# Altium PCB alarm_clock_devkit.PcbDoc
Units mil, origin at the board's own origin, x right, y up, seen from the top; angles counter-clockwise.
Board outline 2165.35 x 2559.06 mil, 4 copper layers (Top Layer, Layer 1, Layer 2, Bottom Layer), stack 62.449 mil thick; 85 components, 79 nets, 322 pads, 233 vias.
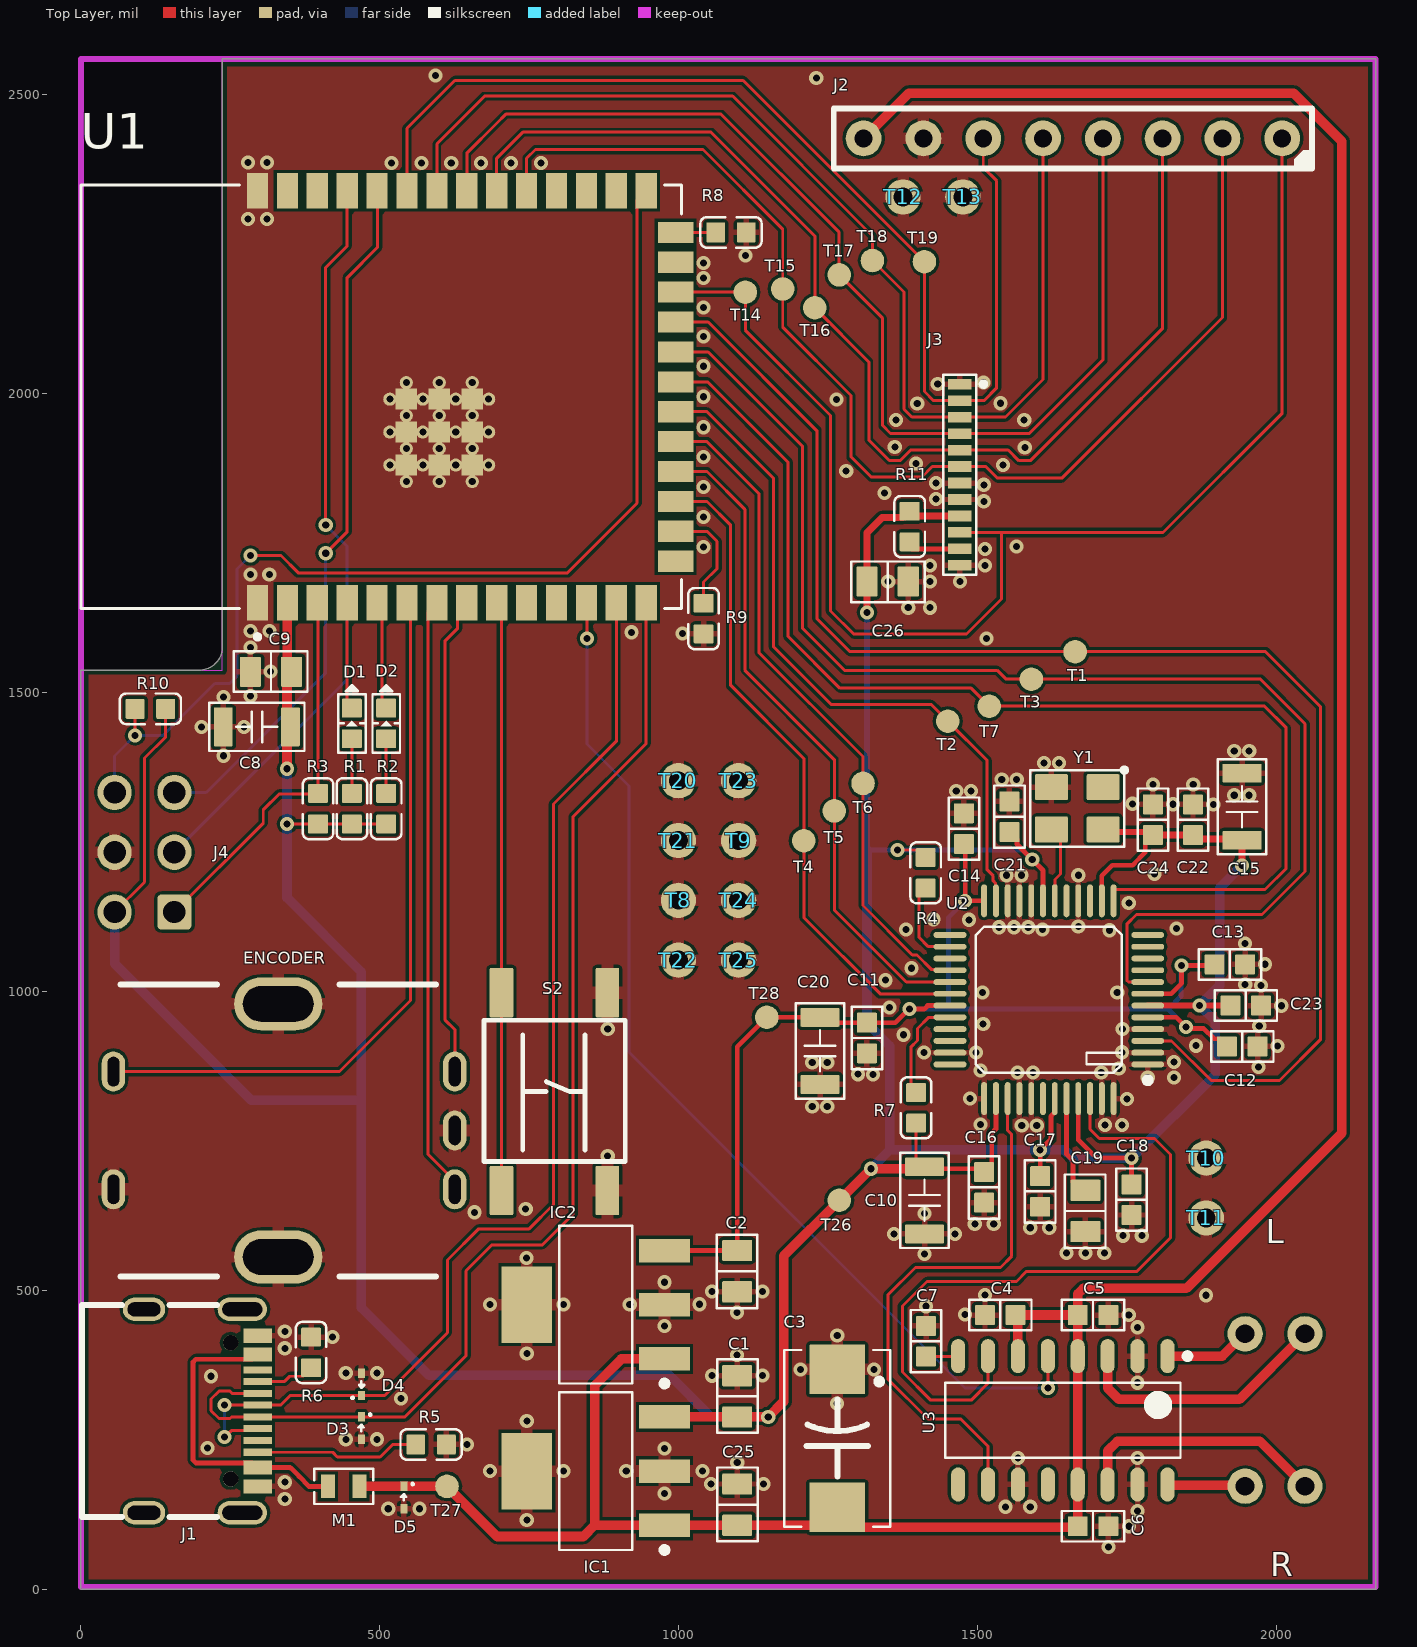
[diagram p0: Top Layer view]
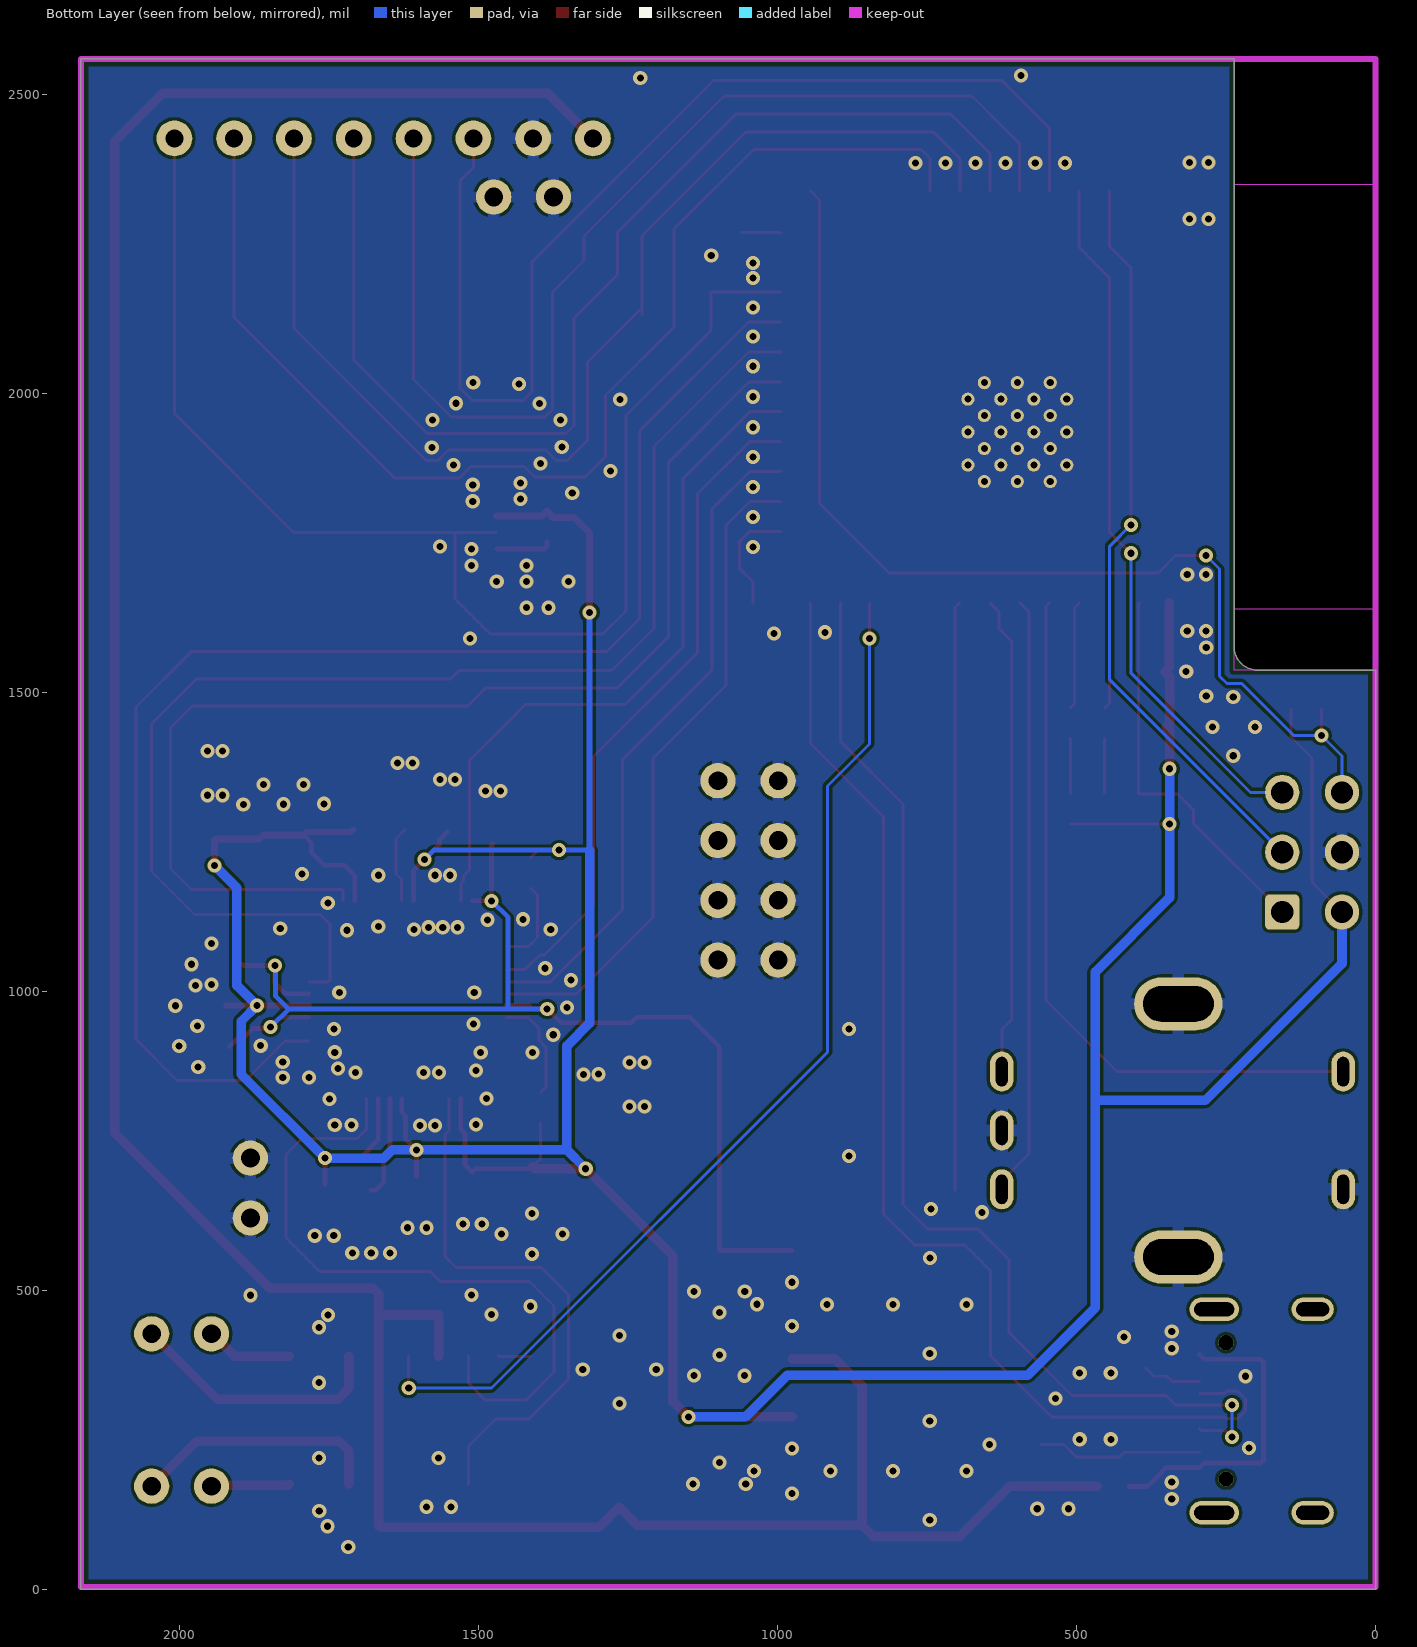
[diagram p1: Bottom Layer view, seen from below]
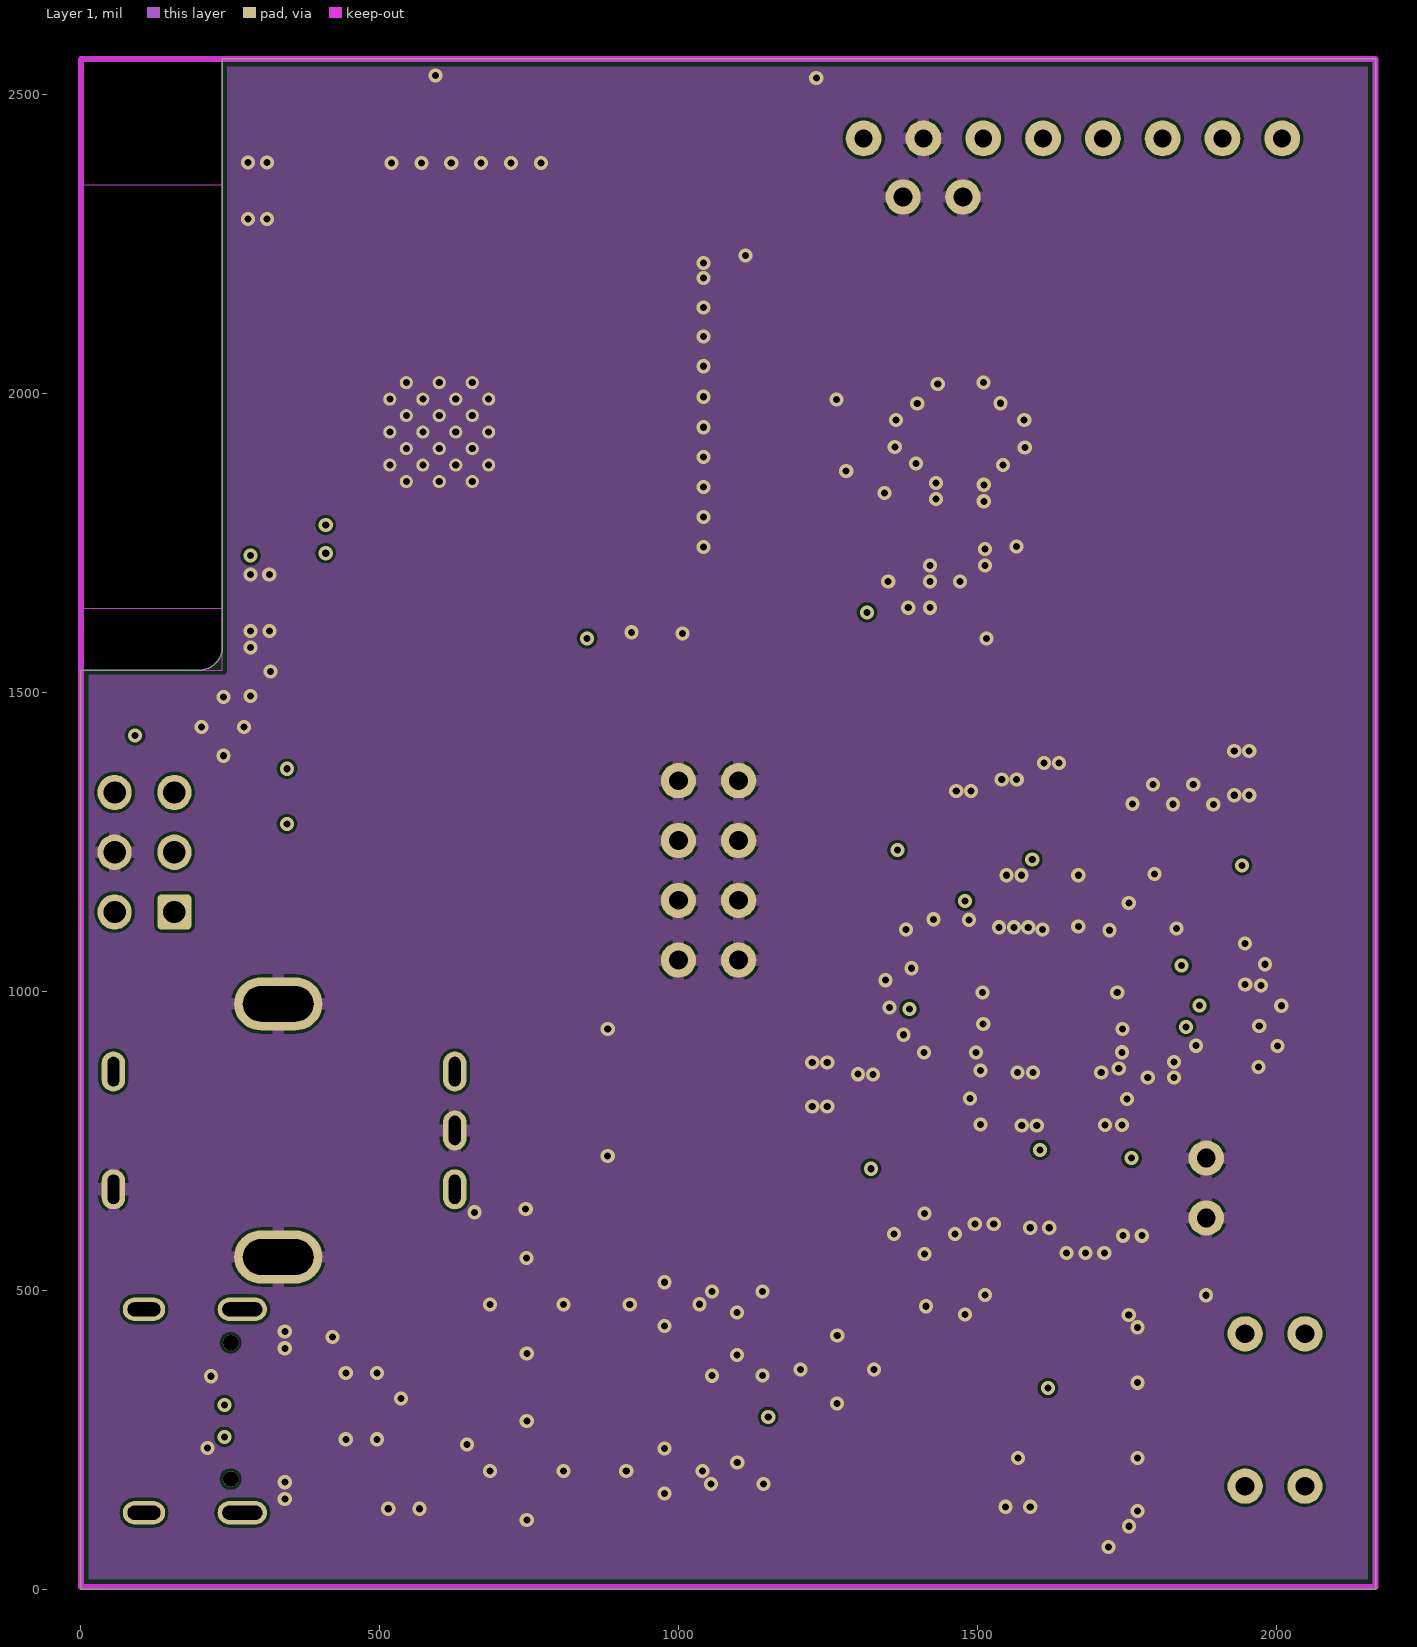
[diagram p2: Layer 1]
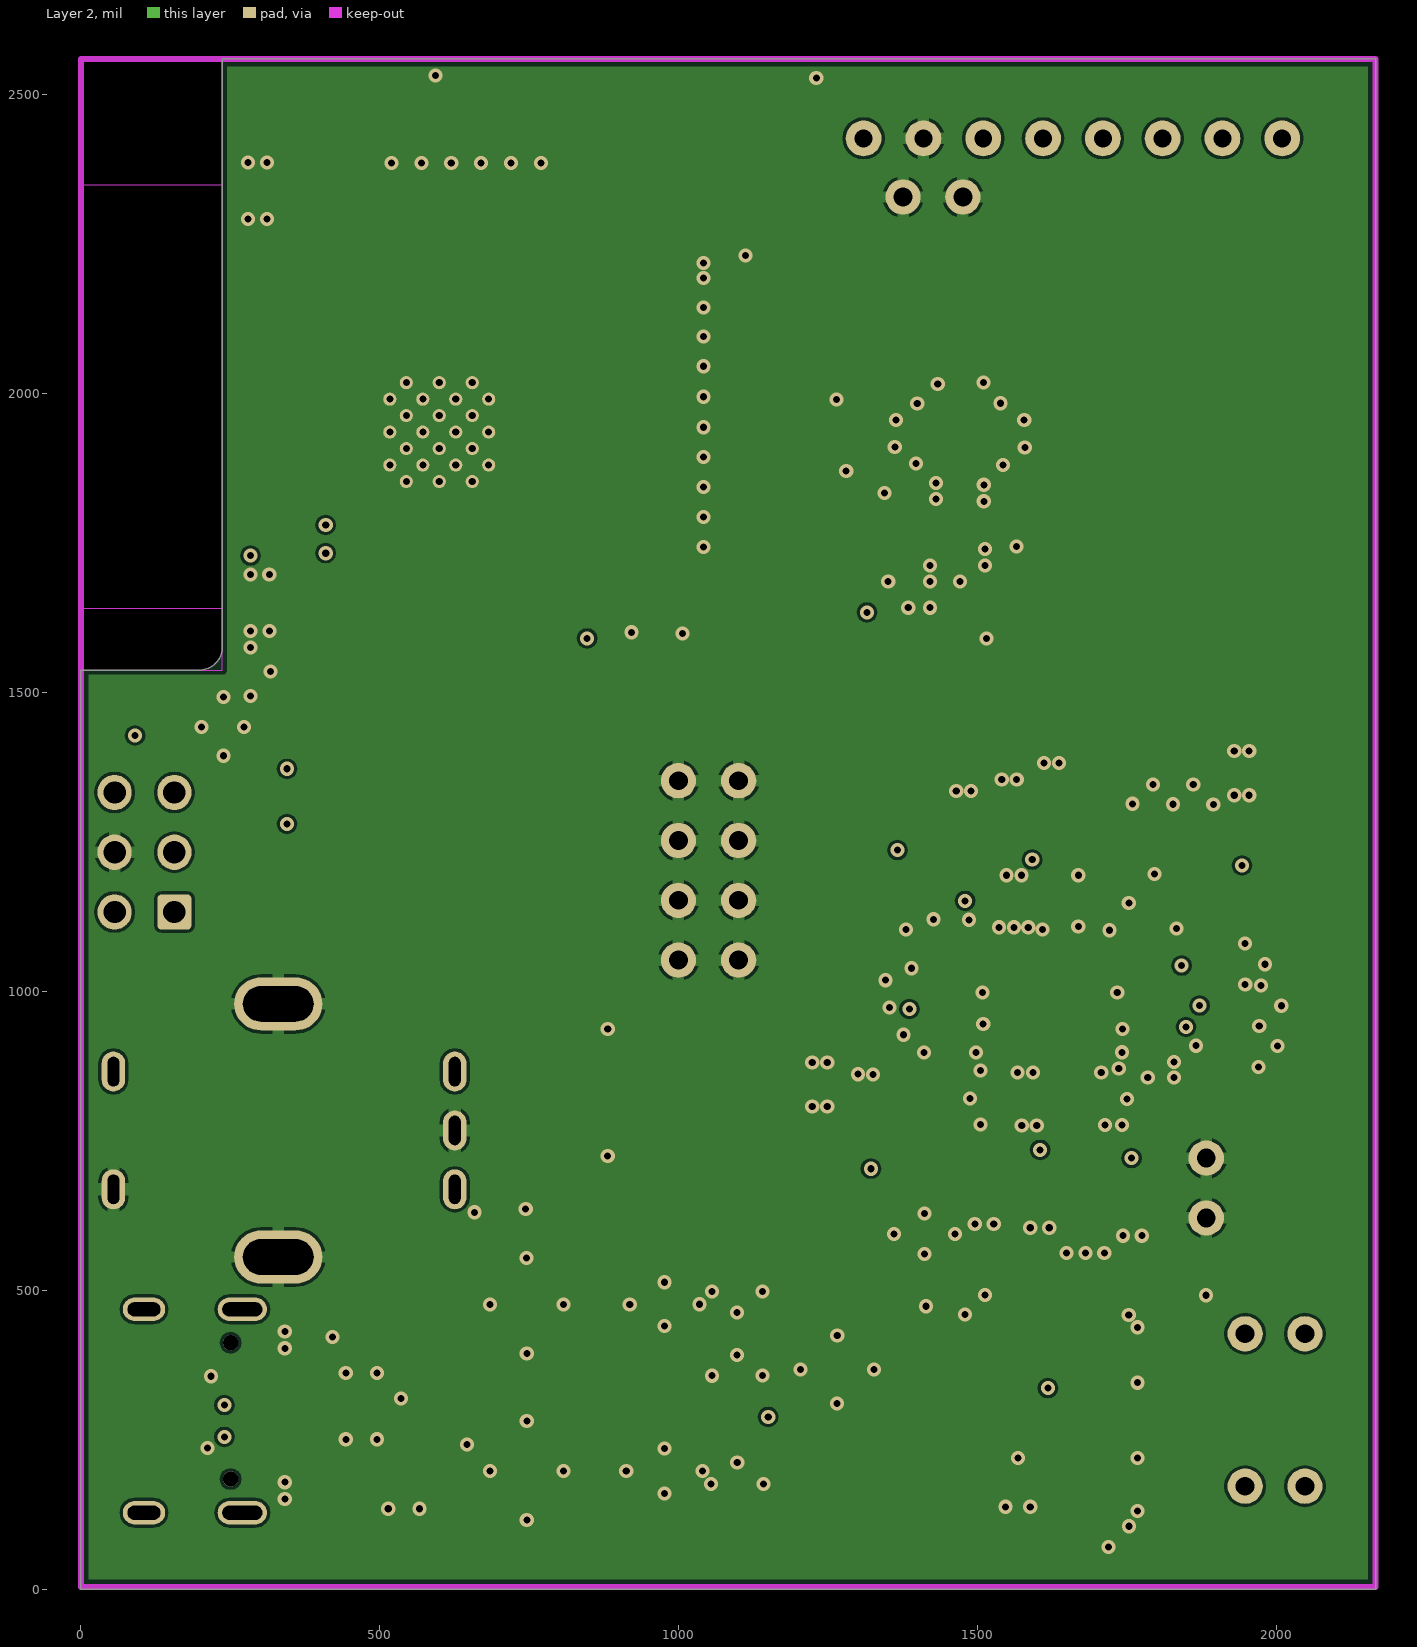
[diagram p3: Layer 2]

## Layer stack, top to bottom
Top Solder: solder mask 1, SM-001, Dk 4
Top Layer: signal copper 1.378
Dielectric 2: prepreg 8.2835, PP-006, Dk 4.1
Layer 1: signal copper 0.5984
Dielectric 1: core 41.9291, Core-043, Dk 4.3
Layer 2: signal copper 0.5984
Dielectric 3: prepreg 8.2835, PP-006, Dk 4.1
Bottom Layer: signal copper 1.378
Bottom Solder: solder mask 1, SM-001, Dk 4

## Board outline
0,0 0,1536.8 197.74,1536.8 197.83,1536.89 ccw(c197.83,1575.79) 236.73,1575.79 236.72,1575.78 236.72,2559.06 2165.35,2559.06 2165.35,0

## Design rules (kind name [scope] priority, off if disabled: settings)
AcuteAngle [All] p1: minimum=4.50000000000000E+0001 checktracksonly=TRUE
BoardOutlineClearance [InLayerClass('Electrical Layers')] p1: gap=7.87 ignorepadtopadclearanceinfootprint=FALSE except(15.75: Arc-SplitBarrior Arc-SplitContinuation Track-SplitBarrior Track-SplitContinuation SMDPad-SplitBarrior SMDPad-SplitContinuation THPad-SplitBarrior THPad-SplitContinuation Via-SplitBarrior Via-SplitContinuation Fill-SplitBarrior Fill-SplitContinuation Poly-SplitBarrior Poly-SplitContinuation Region-SplitBarrior Region-SplitContinuation Text-SplitBarrior Text-SplitContinuation)
Clearance Clearance_AGND [InPadClass('AGND_TIE') vs InNet('GND') And OnBottomLayer] p1: gap=-3.94 ignorepadtopadclearanceinfootprint=FALSE except(0: Arc-Hole Track-Hole SMDPad-Hole THPad-Hole Via-Hole Fill-Hole Poly-Hole Region-Hole Text-Hole)
Clearance Clearance_VCC [InNetClass('POWER24') And ((IsPad And (InNet('GND') Or InNet('VCC_LED'))) Or InPolygon) vs InNetClass('POWER24') And ((IsPad And (InNet('GND') Or InNet('VCC_LED'))) Or InPolygon)] p2: gap=20 ignorepadtopadclearanceinfootprint=FALSE except(0: Arc-Hole Track-Hole SMDPad-Hole THPad-Hole Via-Hole Fill-Hole Poly-Hole Region-Hole Text-Hole)
Clearance Clearance_Keepout [All vs IsKeepOut] p3: gap=7.87 ignorepadtopadclearanceinfootprint=FALSE except(0: Arc-Hole Track-Hole SMDPad-Hole THPad-Hole Via-Hole Fill-Hole Poly-Hole Region-Hole Text-Hole)
Clearance [All] p4: gap=5 ignorepadtopadclearanceinfootprint=FALSE except(0: Arc-Hole Track-Hole SMDPad-Hole THPad-Hole Via-Hole Fill-Hole Poly-Hole Region-Hole Text-Hole; 5.98: SMDPad-SMDPad; 7.87: Via-Via Poly-Region; 8: Track-THPad Track-Via)
ComponentClearance ComponentClearance_TestPoints [All vs InComponentClass('TestPoint')] p1: gap=0 collisioncheckmode=3 verticalgap=0 showdistances=FALSE
ComponentClearance [All] p2: gap=3.94 collisioncheckmode=3 verticalgap=100000 showdistances=FALSE
HoleSize [All] p1: absolutevalues=TRUE maxlimit=118.11 minlimit=11.81 maxpercent=80.000 minpercent=20.000
HoleToHoleClearance [All] p1: gap=7.87 allowstackedmicrovias=TRUE
MinimumAnnularRing MinimumAnnularRing_Pad [IsPad] p1: minimumring=5.12
MinimumAnnularRing MinimumAnnularRing_Via [IsVia] p2: minimumring=5.12
MinimumSolderMaskSliver [All] p1: minsoldermaskwidth=3.94
PlaneClearance [All] p1: clearance=5
PlaneConnect [All] p1: planeconnectstyle=Relief reliefexpansion=20 reliefentries=4 reliefconductorwidth=5 reliefairgap=5
PolygonConnect PolygonConnect_1 [InComponentClass('ESP') And IsPad vs InNet('GND')] p1: connectstyle=Direct reliefconductorwidth=10 reliefentries=4 polygonreliefangle="90 Angle" airgapwidth=10
PolygonConnect PolygonConnect_FET_HEATSINK [InNet('VCC_LED') OR InNet('VCC24') OR InNet('PSU_SW') OR InNet('VCC3V3') OR InComponent('U4') OR InNet('NetC34_2') OR InNet('AGND') OR InPadClass('AGND_TIE') OR IsTestpoint] p2: connectstyle=Direct reliefconductorwidth=10 reliefentries=4 polygonreliefangle="90 Angle" airgapwidth=5
PolygonConnect PolygonConnect_HOLES [InNet('GND') vs (PadViaLibraryTemplate='mounting_hole') OR (PadViaLibraryTemplate='strain_hole') OR (PadViaLibraryTemplate='gnd_stitch')] p3: connectstyle=Direct reliefconductorwidth=10 reliefentries=4 polygonreliefangle="90 Angle" airgapwidth=5
PolygonConnect PolygonConnect_BIGPADS [(AsMils(PadXSize_TopLayer) >= 50) AND (AsMils(PadYSize_TopLayer) >= 50)] p4: connectstyle=Relief reliefconductorwidth=20 reliefentries=4 polygonreliefangle="90 Angle" airgapwidth=5
PolygonConnect PolygonConnect_MEDIUMPADS [(AsMils(PadXSize_TopLayer) + AsMils(PadYSize_TopLayer)) >= 100] p5: connectstyle=Relief reliefconductorwidth=21.26 reliefentries=4 polygonreliefangle="90 Angle" airgapwidth=5
PolygonConnect [All] p6: connectstyle=Relief reliefconductorwidth=10 reliefentries=4 polygonreliefangle="90 Angle" airgapwidth=5
RoutingVias [All] p1: holewidth=28 width=50 viastyle="Through Hole" minholewidth=28 minwidth=50 maxholewidth=28 maxwidth=50 useviatemplates=TRUE viatemplateguid#1={55BDA720-6EEC-452C-9E69-FEF155F6DC43} viatemplateguid#2={73302ACE-9E23-44E9-BB12-906B9518E2AD} viatemplatename#1=GND_VIA viatemplatename#2=POWER_VIA
ShortCircuit ShortCircuit_AGND [InPadClass('AGND_TIE') vs InNet('GND')] p1: allowed=TRUE
ShortCircuit [All] p2: allowed=FALSE
SilkToSilkClearance [All] p1: silktosilkclearance=0
SilkToSolderMaskClearance [All] p1: minsilkscreentomaskgap=0 clearancetoexposedcopper=TRUE
SolderMaskExpansion SolderMaskExpansion_VIA [PadViaLinkedToTemplate] p1: expansion=1.97 istentingtop=TRUE
SolderMaskExpansion [All] p2: expansion=1.97 istentingtop=FALSE
Width [All] p1: maxlimit=50 minlimit=5 preferedwidth=5
21 further rules are at their usual default settings.

## Classes and differential pairs
component class ESP: U1
component class USB_POWER: C1 C2 C25 D3 D4 D5 IC1 IC2 J1 M1 R5 R6 T26 T27 T28
component class ESP32_ETC: C3 C4 C5 C6 C7 C8 C9 C10 C11 C12 C13 C14 C15 C16 C17 C18 C19 C20 C21 C22 C23 C24 C26 J2 J3 J4 L R R3 R4 R7 R8 R9 R10 R11 T1 T2 T3 T4 T5 T6 T7 T14 T15 T16 T17 T18 T19 U1 U2 U3 Y1
component class BUTTONS_LEDS: D1 D2 ENCODER R1 R2 S2 T8 T9 T10 T11 T12 T13 T20 T21 T22 T23 T24 T25

## Components (designator, comment, footprint, x,y, rotation, side; value= is the part's Value field where it differs from the comment)
C1 "22uF" "CAP 0805_2012" 1097.64,322.37 r270 top
C2 "22uF" "CAP 0805_2012" 1097.64,531.69 r90 top
C3 "470uF" CAPMP7343X11L 1265,252.16 r270 top
C4 "100nF" "CAP 0603_1608" 1537.57,458.35 r0 top
C5 "100nF" "CAP 0603_1608" 1692.68,458.35 r180 top
C6 "100nF" "CAP 0603_1608" 1692.68,105.09 r180 top
C7 "" "CAP 0603_1608" 1413.39,414.54 r270 top
C8 "10uF" "CAP 1210_3225" 294.28,1441.94 r0 top
C9 "100nF" "CAP 0805_2012" 317.89,1534.05 r0 top
C10 "10uF" "CAP 1210_3225" 1410.83,650.17 r90 top
C11 "100nF" "CAP 0603_1608" 1314.57,921.69 r90 top
C12 "100nF" "CAP 0603_1608" 1942.38,907.56 r180 top
C13 "100nF" "CAP 0603_1608" 1921.57,1044.8 r180 top
C14 "100nF" "CAP 0603_1608" 1476.83,1271.76 r270 top
C15 "10uF" "CAP 1210_3225" 1941.83,1308.37 r270 top
C16 "100nF" "CAP 0603_1608" 1510.54,671.77 r90 top
C17 "100nF" "CAP 0603_1608" 1604.28,665.02 r90 top
C18 "100nF" "CAP 0603_1608" 1757.09,651.21 r90 top
C19 "1uF" "CAP 0805_2012" 1680.02,632.4 r90 top
C20 "10uF" "CAP 1210_3225" 1236.12,900.08 r90 top
C21 "100nF" "CAP 0603_1608" 1552.83,1291.76 r270 top
C22 "100nF" "CAP 0603_1608" 1859.83,1286.76 r270 top
C23 "100nF" "CAP 0603_1608" 1948.13,975.87 r180 top
C24 "100nF" "CAP 0603_1608" 1792.83,1286.76 r270 top
C25 "2.2uF" "CAP 0805_2012" 1097.64,141.27 r270 top
C26 "1uF" "CAP 0805_2012" 1349.13,1685.04 r180 top
D1 "" "SMT_LED 0603_RED" 453.14,1447.72 r90 top
D2 "" "SMT_LED 0603_RED" 510.6,1447.72 r90 top
D3 "TVS_DIODE" SODFL98X40-2L 469,269.21 r270 top
D4 "TVS_DIODE" SODFL98X40-2L 469,342.42 r90 top
D5 "TVS_DIODE" SODFL98X40-2L 540,153.07 r270 top
ENCODER "ROTARY_ENCODER" ENCODER 330,767 r90 top
IC1 "AZ1117CH" SOT230P700X180-4N 860.87,197.32 r180 top
IC2 "AZ1117CH" SOT230P700X180-4N 860.87,475.63 r180 top
J1 "USB_C" USB-C-SMD_G-SWITCH_GT-USB-7010ASV 200,297.75 r270 top
J2 "CON_8" CON8 2009.06,2426.18 r180 top
J3 "LCD_CON12" LCD_CON12 1470,2015.14 r270 top
J4 "ESP_PROG" ESP_PROG 106.3,1232.28 r90 top
L "JST_XH" JST_XH_x2 1997,427 r0 top
M1 "FUSE" "FUSE 0603_1608 0.5MM" 439.38,171.77 r0 top
R "JST_XH" JST_XH_x2 1997,172 r0 top
R1 "" "RES 0603_1608" 453.14,1305.13 r90 top
R2 "" "RES 0603_1608" 510.6,1305.13 r90 top
R3 "100k" "RES 0603_1608" 396.57,1305.13 r270 top
R4 "100k" "RES 0603_1608" 1412.83,1197.9 r270 top
R5 "5.1k" "RES 0603_1608" 585.59,241.85 r180 top
R6 "5.1k" "RES 0603_1608" 385,395.74 r270 top
R7 "100k" "RES 0603_1608" 1396.83,804.86 r90 top
R8 "100k" "RES 0603_1608" 1087.15,2268.98 r0 top
R9 "100k" "RES 0603_1608" 1041.4,1623.01 r90 top
R10 "" "RES 0603_1608" 116.14,1472.13 r180 top
R11 "100" "RES 0603_1608" 1386.09,1776.95 r90 top
S2 "4-1437565-1" FSM-SWITCH 792,832 r180 top
T1 "TESTPOINT" TESTPOINT_1MM 1662.66,1567.65 r0 top
T2 "TESTPOINT" TESTPOINT_1MM 1449.83,1451.44 r0 top
T3 "TESTPOINT" TESTPOINT_1MM 1589.56,1521.66 r0 top
T4 "TESTPOINT" TESTPOINT_1MM 1209,1251.68 r0 top
T5 "TESTPOINT" TESTPOINT_1MM 1260,1301.4 r0 top
T6 "TESTPOINT" TESTPOINT_1MM 1308,1347.46 r0 top
T7 "TESTPOINT" TESTPOINT_1MM 1519.11,1476.55 r0 top
T8 "TESTPOINT" TESTPOINT_TH 999.25,1151.88 r0 top
T9 "TESTPOINT" TESTPOINT_TH 1100,1251.88 r0 top
T10 "TESTPOINT" TESTPOINT_TH 1882.01,720.73 r0 top
T11 "TESTPOINT" TESTPOINT_TH 1882.01,620.73 r0 top
T12 "TESTPOINT" TESTPOINT_TH 1375,2328.15 r90 top
T13 "TESTPOINT" TESTPOINT_TH 1475,2328.15 r90 top
T14 "TESTPOINT" TESTPOINT_1MM 1111.22,2168.98 r0 top
T15 "TESTPOINT" TESTPOINT_1MM 1173.74,2174.3 r0 top
T16 "TESTPOINT" TESTPOINT_1MM 1227.31,2142.76 r0 top
T17 "TESTPOINT" TESTPOINT_1MM 1268.09,2197.88 r0 top
T18 "TESTPOINT" TESTPOINT_1MM 1323.81,2221.81 r0 top
T19 "TESTPOINT" TESTPOINT_1MM 1410.68,2219.87 r0 top
T20 "TESTPOINT" TESTPOINT_TH 999.25,1351.88 r0 top
T21 "TESTPOINT" TESTPOINT_TH 999.25,1251.88 r0 top
T22 "TESTPOINT" TESTPOINT_TH 999.25,1051.88 r270 top
T23 "TESTPOINT" TESTPOINT_TH 1100,1351.88 r270 top
T24 "TESTPOINT" TESTPOINT_TH 1100,1151.88 r270 top
T25 "TESTPOINT" TESTPOINT_TH 1100,1051.88 r270 top
T26 "TESTPOINT" TESTPOINT_1MM 1268.31,650.17 r0 top
T27 "TESTPOINT" TESTPOINT_1MM 612.23,171.77 r0 top
T28 "TESTPOINT" TESTPOINT_1MM 1147.18,956.18 r0 top
U1 "ESP32-S3-WROOM-1-N16R2" XCVR_ESP32-S3-WROOM-1-N16R2 502.47,1993.98 r90 top
U2 "VS1053B" CQFP50P900X900X140-48N 1618.81,985.71 r180 top
U3 "PAM8403" SOIC127P600X175-16N 1642.09,282.32 r270 top
Y1 "12.288MHz" "NDK NX3225GA" 1666.36,1305.73 r180 top

## Footprints (in the part's own frame and the unit in brackets; to place one, negate y for a bottom-side part, rotate by r counter-clockwise, add the part's x,y. Pads: shape width x height; smd on the part's side, far side on the other; paste and mask are expansions set on the pad)
"CAP 0603_1608" [mm] "Chip Capacitor, 2-Leads, Body 1.60x0.80mm, IPC Medium Density"
  rrect10% 0.848x0.848 smd: 1(-0.65,0) 2(0.65,0)
  silkscreen extent -1.33,-0.65 1.33,0.65, body extent -0.8,-0.41 0.8,0.41, height 0.82
"CAP 0805_2012" [mm] "Chip Capacitor, 2-Leads, Body 2.00x1.20mm, IPC Medium Density"
  rrect10% 0.9x1.275 smd: 1(-0.876,0) 2(0.876,0)
  silkscreen extent -1.58,-0.85 1.55,0.87, body extent -1,-0.64 1,0.64, height 1.26
"CAP 1210_3225" [mm] "Chip Capacitor, 2-Leads, Body 3.20x1.60mm, IPC High Density"
  rrect10% 0.8x1.65 smd: 1(-1.425,0) 2(1.425,0)
  silkscreen extent -2.02,-1.02 2.02,1.02, body extent -1.6,-0.8 1.6,0.8, height 1.2
CAPMP7343X11L [mm] "Molded Capacitor, 2-Leads, Body 7.30x4.30mm, IPC High Density"
  rrect1% 2.1x2.35 smd: 1(2.925,0) 2(-2.925,0)
  silkscreen extent -3.75,-2.25 3.75,2.25, body extent -3.97,-2.25 3.97,2.25, height 1.1
CON8 [mil]
  round 60 hole 30: 1(0,0) 2(100,0) 3(200,0) 4(300,0) 5(400,0) 6(500,0) 7(600,0) 8(700,0)
  silkscreen extent -50,-50 750,50
CQFP50P900X900X140-48N [mm] "CQFP, 48-Leads, Body 9.00x9.00mm, Pitch 0.50mm, IPC Medium Density"
  oval 1.4x0.25 smd: 1(-4.2,2.75) 2(-4.2,2.25) 3(-4.2,1.75) 4(-4.2,1.25) 5(-4.2,0.75) 6(-4.2,0.25) 7(-4.2,-0.25) 8(-4.2,-0.75) 9(-4.2,-1.25) 10(-4.2,-1.75) 11(-4.2,-2.25) 12(-4.2,-2.75) 25(4.2,-2.75) 26(4.2,-2.25) 27(4.2,-1.75) 28(4.2,-1.25) 29(4.2,-0.75) 30(4.2,-0.25) 31(4.2,0.25) 32(4.2,0.75) 33(4.2,1.25) 34(4.2,1.75) 35(4.2,2.25) 36(4.2,2.75)
  oval 0.25x1.4 smd: 13(-2.75,-4.2) 14(-2.25,-4.2) 15(-1.75,-4.2) 16(-1.25,-4.2) 17(-0.75,-4.2) 18(-0.25,-4.2) 19(0.25,-4.2) 20(0.75,-4.2) 21(1.25,-4.2) 22(1.75,-4.2) 23(2.25,-4.2) 24(2.75,-4.2) 37(2.75,4.2) 38(2.25,4.2) 39(1.75,4.2) 40(1.25,4.2) 41(0.75,4.2) 42(0.25,4.2) 43(-0.25,4.2) 44(-0.75,4.2) 45(-1.25,4.2) 46(-1.75,4.2) 47(-2.25,4.2) 48(-2.75,4.2)
  silkscreen extent -4.33,-3.1 3.1,3.55, body extent -4.5,-4.5 4.5,4.5, height 1.15
ENCODER [mm] "Rotary encoder"
  oval 1.7x1 hole 0.5 slot 1.25 at 0 deg: 1(-2.5,-7.5) 2(0,-7.5) 3(2.5,-7.5) 4(-2.5,7) 5(2.5,7)
  rrect100% 2.25x3.75 hole 1.5 slot 3 at 90 deg: 2(-5.375,0)
  oval 2.25x3.75 hole 1.5 slot 3 at 90 deg: 2(5.375,0)
  silkscreen extent -6.2,-6.7 6.2,6.7, body extent -6.16,-7.75 6.14,7.25, height 21.4
ESP_PROG [mm]
  rrect25% 1.5x1.45 hole 0.95: 1(-2.54,-1.27)
  oval 1.5x1.45 hole 0.95: 2(0,-1.27) 3(2.54,-1.27) 4(2.54,1.27) 5(0,1.27) 6(-2.54,1.27)
  body extent -5.05,-2.55 5.05,2.55, height 5.4
FSM-SWITCH [mm]
  rrect10% 1x2.1 smd: 1(-2.25,4.2) 1(-2.25,-4.2) 2(2.25,4.2) 2(2.25,-4.2)
  silkscreen extent -3,-3.03 3,2.97, body extent -3,-5 3,5, height 5.07
"FUSE 0603_1608 0.5MM" [mm] "Chip Fuse 1.5A AC 5V DC, 2-Leads, Body 1.54x0.85mm"
  rect 0.6x1 smd: 1(-0.67,0) 2(0.67,0)
  silkscreen extent -1.25,-0.75 1.25,0.75, body extent -0.77,-0.42 0.77,0.43, height 0.58
JST_XH_x2 [mm]
  round 1.5 hole 0.8 mask+0: 1(-1.27,0) 2(1.27,0)
  body extent -3.61,-2.49 3.61,3.35, height 7.21
LCD_CON12 [mm]
  rect 0.45x1 smd mask+0.05: 1(0,0) 2(0.7,0) 3(1.4,0) 4(2.1,0) 5(2.8,0) 6(3.5,0) 7(4.2,0) 8(4.9,0) 9(5.6,0) 10(6.3,0) 11(7,0) 12(7.7,0)
  silkscreen extent -0.4,-0.7 8.1,1.1, body extent -13.94,-0.23 21.66,50.11, height 1.55
"NDK NX3225GA" [mm] "Crystal, 4-Leads, Body 2.50x3.20mm, Pitch 2.20mm, IPC Medium Density"
  rrect10% 1.4x1.1 smd: 1(-1.1,-0.9) 2(1.1,-0.9) 3(1.1,0.9) 4(-1.1,0.9)
  silkscreen extent -2.05,-1.67 2,1.63, body extent -1.61,-1.26 1.61,1.26, height 0.75
"RES 0603_1608" [mm] "Chip Resistor, 2-Leads, Body 1.60x0.80mm, IPC Medium Density"
  rrect12% 0.8x0.85 smd: 1(-0.65,0) 2(0.65,0)
  silkscreen extent -1.3,-0.65 1.3,0.65, body extent -0.8,-0.4 0.8,0.4, height 0.45
"SMT_LED 0603_RED" [mm] "Chip Diode, 2-Leads, Body 1.60x0.80mm, IPC Medium Density"
  rrect10% 0.8x0.85 smd: 1(-0.65,0) 2(0.65,0)
  silkscreen extent -1.24,-0.58 1.63,0.58, body extent -0.8,-0.4 0.8,0.4, height 0.53
SODFL98X40-2L [mm] "SODFL, 0.6x1.0mm"
  rrect1% 0.4x0.3 smd: 1(-0.475,0) 2(0.475,0)
  silkscreen extent -0.62,-0.13 0.13,0.42, body extent -0.49,-0.33 0.49,0.33, height 0.4
SOIC127P600X175-16N [mm] "SOIC, 16-Leads, Body 9.90x3.90mm, Pitch 1.27mm, IPC Medium Density"
  oval 1.45x0.6 smd: 1(-2.725,4.445) 2(-2.725,3.175) 3(-2.725,1.905) 4(-2.725,0.635) 5(-2.725,-0.635) 6(-2.725,-1.905) 7(-2.725,-3.175) 8(-2.725,-4.445) 9(2.725,-4.445) 10(2.725,-3.175) 11(2.725,-1.905) 12(2.725,-0.635) 13(2.725,0.635) 14(2.725,1.905) 15(2.725,3.175) 16(2.725,4.445)
  silkscreen extent -2.85,-5 1.6,5.42, body extent -3,-5 3,5, height 1.75
SOT230P700X180-4N [mm] "SOT223, 4-Leads, Body 6.50x7.00mm (avg), Pitch 2.30mm, IPC Medium Density"
  rect 2.15x1 smd: 1(-2.925,2.3) 2(-2.925,0) 3(-2.925,-2.3)
  rect 2.15x3.25 smd: 4(2.925,0)
  silkscreen extent -3.05,-3.35 1.55,3.47, body extent -3.5,-3.35 3.5,3.35, height 1.8
TESTPOINT_1MM [mm]
  round 1 smd paste-99 mask+0: 1(0,0)
TESTPOINT_TH [mm]
  round 1.5 hole 0.8 mask+0: 1(0,0)
USB-C-SMD_G-SWITCH_GT-USB-7010ASV [mm]
  oval 1x2.1 hole 0.6 slot 1.7 at 90 deg paste+0 mask+0.05: 1(-4.32,1.78) 2(4.32,1.78)
  oval 1x1.8 hole 0.6 slot 1.4 at 90 deg paste+0 mask+0.05: 3(4.32,-2.4) 4(-4.32,-2.4)
  rect 0.6x1.205 smd paste-100 mask+0.11: A1B12(-3.2,2.435) A4B9(-2.4,2.435) B1A12(3.2,2.435) B4A9(2.4,2.435)
  rect 0.3x1.205 smd paste-100 mask+0.11: A5(-1.25,2.435) A6(-0.25,2.435) A7(0.25,2.435) A8(1.25,2.435) B5(1.75,2.435) B6(0.75,2.435) B7(-0.75,2.435) B8(-1.75,2.435)
  round 0.65 hole 0.65 unplated paste-99 mask+0: X(-2.9,1.28) X(2.89,1.28)
  silkscreen extent -4.5,-5.03 4.5,0.69, body extent -4.47,-4.98 4.47,2.72
XCVR_ESP32-S3-WROOM-1-N16R2 [mm]
  rect 1.5x0.9 smd: 2(-8.75,3.99) 3(-8.75,2.72) 4(-8.75,1.45) 5(-8.75,0.18) 6(-8.75,-1.09) 7(-8.75,-2.36) 8(-8.75,-3.63) 9(-8.75,-4.9) 10(-8.75,-6.17) 11(-8.75,-7.44) 12(-8.75,-8.71) 13(-8.75,-9.98) 14(-8.75,-11.25) 27(8.75,-11.25) 28(8.75,-9.98) 29(8.75,-8.71) 30(8.75,-7.44) 31(8.75,-6.17) 32(8.75,-4.9) 33(8.75,-3.63) 34(8.75,-2.36) 35(8.75,-1.09) 36(8.75,0.18) 37(8.75,1.45) 38(8.75,2.72) 39(8.75,3.99) GND(-8.75,5.26) GND(8.75,5.26)
  rect 0.9x1.5 smd: 15(-6.985,-12.5) 16(-5.715,-12.5) 17(-4.445,-12.5) 18(-3.175,-12.5) 19(-1.905,-12.5) 20(-0.635,-12.5) 21(0.635,-12.5) 22(1.905,-12.5) 23(3.175,-12.5) 24(4.445,-12.5) 25(5.715,-12.5) 26(6.985,-12.5)
  round 0.56 hole 0.3 mask+0: GND(-3.6,-3.86) GND(-3.6,-2.46) GND(-3.6,-1.06) GND(-2.9,-1.76) GND(-2.9,-0.36) GND(-2.9,-4.56) GND(-2.9,-3.16) GND(-2.2,-2.46) GND(-2.2,-1.06) GND(-2.2,-3.86) GND(-1.5,-0.36) GND(-1.5,-3.16) GND(-1.5,-1.76) GND(-1.5,-4.56) GND(-0.8,-1.06) GND(-0.8,-2.46) GND(-0.8,-3.86) GND(-0.1,-0.36) GND(-0.1,-1.76) GND(-0.1,-3.16) GND(-0.1,-4.56) GND(0.6,-1.06) GND(0.6,-2.46) GND(0.6,-3.86)
  rect 0.9x0.9 smd mask+0: GND(-2.9,-2.46) GND(-2.9,-1.06) GND(-2.9,-3.86) GND(-1.5,-1.06) GND(-1.5,-3.86) GND(-1.5,-2.46) GND(-0.1,-1.06) GND(-0.1,-2.46) GND(-0.1,-3.86)
  Keep-Out Layer region: 9,6.75 -9,6.75 -9,12.75 9,12.75
  Keep-Out Layer region: 9,6.75 -9,6.75 -9,12.75 9,12.75
  silkscreen extent -10.3,-12.75 9,12.75, body extent -9,-12.75 9,12.75, height 3.25

## Part data
C1 C2 C4 C5 C6 C7 C8 C9 C10 C11 C12 C13 C14 C15 C16 C17 C18 C19 C20 C21 C22 C23 C24 C25 C26: library part CAP_CERAMIC, "MLCC"
C3: library part EEFCS1A470R, "Electrolytic Capacitor", Voltage=6.3V, MPN=EEFCS1A470R, TYPE=Polymer, Vendor=Panasonic
D1 D2: library part LED, "LED"
ENCODER: "Rotary Encoder"
R1 R2 R3 R4 R5 R6 R7 R8 R9 R10 R11: library part RESISTOR, "Resistor"
S2: library part BUTTON, "6x6mm tactile switch SPST_NO", Manufacturer_Name="TE Connectivity", RS Part Number=1616046, Allied_Number=R1117787, Datasheet Link=http://uk.rs-online.com/web/p/products/1616046, Manufacturer_Part_Number=4-1437565-1
U1: "Bluetooth, WiFi 802.11b/g/n, Bluetooth v5.0 Transceiver Module 2.4GHz PCB Trace Surface Mount", Package="NON STANDARD Espressif Systems", Check_prices=https://www.snapeda.com/parts/ESP32S3WROOM1N16R2/Espressif+Systems/view-part/?ref=eda, ClassName=ESP, MF="Espressif Systems", MP=ESP32S3WROOM1N16R2, SnapEDA_Link=https://www.snapeda.com/parts/ESP32S3WROOM1N16R2/Espressif+Systems/view-part/?ref=snap
U2: "VS1053B Music Maker Audio Feather Platform Evaluation Expansion Board", Package=None, Availability=Unavailable, MF="SparkFun Electronics", MP=VS1053B, Price=None, SnapEDA_Link=https://www.snapeda.com/parts/VS1053B/SparkFun%20Electronics/view-part/525112/?ref=snap
U3: "Audio Amp Speaker 2-CH Stereo 3.2W Class-D 16-Pin SOP T/R", Package=None, Availability="In Stock", Check_prices=https://www.snapeda.com/parts/PAM8403/Zetex/view-part/?ref=eda, MF="Diodes Zetex", MP=PAM8403, Price=None, SnapEDA_Link=https://www.snapeda.com/parts/PAM8403/Zetex/view-part/?ref=snap
Y1: library part OSCILLATOR, "SMT Crystal"
IC1: VOUT=3.3
IC2: VOUT=1.8

## Via types
v1: diameter 23.62, hole 11.81, Top Layer to Bottom Layer, tented both sides, 233 vias

## Nets (pads, with @x,y where several pads share a name; then routed paths per layer and width w, separated by ;. In a path a pad name is that pad's centre, name@x,y a point inside that pad or via, vN(x,y) a via of type N, cw(c..) or ccw(c..) an arc to the next point about the centre after c; other vN are vias at no path point)
AUDIO_LEFT_N: L.2 U3.3 | length 436.6
  Top Layer w16: U3.3 1717.09,336.1 1735.84,317.35 1937.36,317.35 L.2
AUDIO_LEFT_P: L.1 U3.1 | length 145.4
  Top Layer w16: U3.1 1908.7,389.6 1946.1,427 L.1
AUDIO_RIGHT_N: R.2 U3.14 | length 423.9
  Top Layer w16: U3.14 1717.09,231.09 1733.28,247.28 1971.72,247.28 R.2
AUDIO_RIGHT_P: R.1 U3.16 | length 131.2
  Top Layer w16: U3.16 1818.61,173.52 1945.48,173.52 R.1
BTN_ENCODER: ENCODER.5 U1.6 | length 1213.7
  Top Layer w5: ENCODER.5 432.43,865.43 551.18,984.18 551.18,1643.7 U1.6
BTN_USER: S2.2 U1.9 | length 986.2
  Top Layer w5: U1.9 703.42,1641.46 S2.2@703.42,666.65
ENC_A: ENCODER.1 U1.7 | length 1005.9
  Top Layer w5: U1.7 580.17,1634.28 580.17,727.46 625.28,682.35 ENCODER.1
ENC_B: ENCODER.3 U1.8 | length 806.2
  Top Layer w5: ENCODER.3 625.28,935.72 608.64,952.36 608.64,1585.15 630.17,1606.68 630.17,1634.28 U1.8
ESP_EN: J4.1 R3.1 U1.3 | length 654.8
  Top Layer w5: J4.1 304.94,1280.92 304.94,1303.16 331.52,1329.73 395.58,1329.73 R3.1 396.57,1648.31 U1.3
GND: C1.1 C2.1 C3.2 C4.1 C5.1 C6.1 C7.1 C8.1 C9.1 C10.1 C11.1 C12.1 C13.1 C14.1 C15.1 C16.1 C17.1 C18.1 C19.1 C20.1 C21.1 C22.1 C23.1 C24.1 C25.1 C26.1 D3.2 D4.2 D5.2 ENCODER.2 ENCODER.4 IC1.2 IC1.4 IC2.2 IC2.4 J1.A1B12 J1.B1A12 J2.7 J3.1 J3.7 J3.8 J3.12 J4.5 R5.1 R6.1 R8.2 R9.1 S2.1 T8.1 T9.1 T10.1 T11.1 T12.1 T13.1 T20.1 T21.1 T22.1 T23.1 T24.1 T25.1 U1.GND U2.1 U2.2 U2.4 U2.16 U2.20 U2.21 U2.22 U2.35 U2.37 U2.40 U2.41 U2.47 U2.48 U3.2 U3.11 U3.15 Y1.2
  other v1: 1718.28,70.6 1752.76,105.09 745.72,115.77 1766.75,130.63 514,134.37 566,134.37 1546.4,137.63 1587.69,137.63 341,150.75 976.03,159.84 1053.44,175.76 1141.44,175.76 341,178.75 684.17,197.32 807.27,197.32 912.06,197.32 1039.83,197.32 1097.64,211.8 1766.87,219.47 1567.09,219.5 976.03,234.84 211.88,235.8 646,241.85 443,250.51 495,250.51 745.72,280.87 1264.75,310.07 535.59,319.02 1766.87,345.17 217.69,355.96 1055.72,356.86 1139.97,357.32 443,361.12 495,361.12 1203.12,367.08 1326.06,367.42 1097.33,391.42 745.72,394.1 341,402.71 421,421.33 1264.88,423.96 341,430.71 1767.09,437.83 975.84,440.09 1752.43,458.16 1478.65,459 1097.44,462.52 1413.61,472.99 684.17,475.63 807.27,475.63 917.87,476.02 1034.61,476.34 1881.54,491.39 1511.98,491.79 1055.15,497.42 1139.84,497.43 976.03,513.15 745.42,553.54 1410.83,560.23 1648.13,561.78 1679.81,561.78 1711.5,561.78 1742.56,591.02 1774.24,591.02 1360,594.06 1461.67,594.06 1587.71,604.28 1619.39,604.28 1494.9,610.56 1526.59,610.56 1410.83,627.89 658.42,630.13 743.87,635.89 881,724 1573.41,775.04 1598.51,775.04 1712.82,775.97 1740.86,775.97 1504.35,777.27 1223.12,807.09 1248.12,807.09 1486.77,820.16 1749.38,819.71 1784.17,855.79 1827.83,855.79 1299.84,861.09 1324.85,860.53 1566.6,863.66 1592.28,863.66 1706.39,863.66 1504.35,867.04 1735.62,870.8 1969.21,872.98 1223.12,880.87 1248.12,880.87 1827.83,881.47 1410.15,897.13 1496.76,897.13 1740.86,897.75 2000.98,908.34 1864.66,908.75 1375.41,927.02 881.04,936.83 1741.86,936.5 1970.69,941.74 1508.98,945.1 1352.25,972.61 2007.5,975.56 1507.54,997.91 1733.22,997.61 1973.73,1009.17 1947.17,1011.26 1345.5,1018.3 1388.9,1038.27 1980.27,1044.93 1946.95,1079.45 1720.19,1101.79 1379.61,1102.99 1608.3,1102.82 1831.98,1105.06 1535.24,1106.76 1560.26,1106.76 1584.28,1106.76 1668.02,1108.3 1485.22,1119.33 1425.97,1120.16 1752.49,1147.37 1547.91,1193.83 1572.93,1193.83 1668.02,1193.83 1795.52,1195.63 1893.79,1312.41 1758.71,1313.29 1826.36,1312.6 1928.83,1327.58 1953.83,1327.58 1463.86,1334.91 1488.86,1334.91 1793.25,1345.84 1860.25,1345.84 1540.03,1353.75 1565.03,1353.75 1610.72,1381.42 1635.72,1381.42 238.18,1393.7 1928.83,1401.36 1953.83,1401.36 201.85,1441.94 272.63,1441.94 238.18,1492.13 283.39,1493.29 316.89,1534.54 283.39,1574.8 1514.76,1589.96 1006,1598 921,1600.15 283.64,1602.14 315.13,1602.14 1383.63,1641.29 1420.01,1641.29 1350.13,1685.04 1420.01,1685.04 1470,1685.04 283.57,1696.85 315.07,1696.85 1420.01,1711.99 1512,1711.99 1512,1739.55 1041.4,1743.05 1564.78,1743.66 1041.4,1793.05 1510,1819.23 1430,1823.23 1343.65,1832.96 1041.4,1843.05 1510,1846.79 1430,1849.79 1279.85,1869.89 1541.95,1880.18 1396.7,1882.28 1041.4,1893.05 1578.53,1909.46 1361.13,1909.91 1041.4,1943.05 1363.13,1955.02 1577.54,1955.47 1398.69,1982.58 1537.79,1983.23 1263.46,1989.23 1041.4,1994.05 1433,2015.14 1509.28,2018.14 1041.4,2045.05 1041.4,2095.05 1041.4,2143.05 1041.4,2192.91 1041.4,2217.88 1111.22,2230.31 279.64,2291.12 311.13,2291.12 519.32,2385.27 569.32,2385.27 619.32,2385.27 669.32,2385.27 719.32,2385.27 769.32,2385.27 279.64,2385.83 311.13,2385.83 1229.84,2527.11 593.26,2531.05
IO0: J4.4 R10.2 U1.27 | length 1812.1
  Top Layer w5: v1(90.55,1427.5) R10.2 ; v1(283.58,1728.41) 334.58,1728.41 363.33,1699.66 813.84,1699.66 930.17,1816 930.17,2323.26 U1.27
  Bottom Layer w5: J4.4 56.3,1393.25 v1(90.55,1427.5) 137.01,1427.5 223.94,1514.44 248.77,1514.44 261.08,1526.75 261.08,1705.91 v1(283.58,1728.41)
LCD_ANODE: J3.11 R11.1 | length 93.4
  Top Layer w8: R11.1 1386.09,1743.49 1390.02,1739.55 J3.11
LCD_BKL: J2.1 J3.10 T14.1 U1.24 | length 2227.6
  Top Layer w5: U1.24 T14.1 1111.22,2105.37 1253.72,1962.86 1253.72,1635.91 1292.47,1597.16 1480.91,1597.16 1539.44,1655.68 1539.44,1767.11 ; J3.10 1539.44,1767.11 ; J2.1 2009.06,1966.31 1809.85,1767.11 1539.44,1767.11
LCD_CLK: J2.4 J3.4 T17.1 U1.33 | length 1943.4
  Top Layer w5: U1.33 645.39,2401.47 694.89,2450.98 710.64,2466.72 1070.35,2466.72 1268.09,2268.98 T17.1 1340.82,2125.15 1340.82,1945.78 1354.14,1932.46 J3.4 1586.09,1932.46 1709.06,2055.43 J2.4
LCD_CS: J2.3 J3.5 T16.1 U1.32 | length 1996.3
  Top Layer w5: U1.32 695.39,2392.88 739.08,2436.58 1053.76,2436.58 1227.31,2263.02 1227.31,2181.03 T16.1 ; T16.1@1227.31,2130.95 T16.1 ; J2.3 1809.06,2108.43 1587.78,1887.15 1568.55,1887.15 1550.8,1904.91 J3.5 1387.78,1904.91 1370.47,1887.59 1351.89,1887.59 1317.75,1921.74 1317.75,2052.33 T16.1
LCD_DC: J2.2 J3.6 T15.1 U1.31 | length 2033.1
  Top Layer w5: U1.31 745.39,2392.88 760.08,2407.58 1040.25,2407.58 1173.74,2274.09 1173.74,2207.56 1173.74,2141.03 1173.74,2110.49 1288.09,1996.15 1288.09,1893.62 1321.75,1859.96 1406.56,1859.96 1423.95,1877.35 J3.6 1513.24,1877.35 1532.71,1857.87 1640.35,1857.87 1909.06,2126.58 J2.2
LCD_DIN: J2.5 J3.3 T18.1 U1.34 | length 1915.9
  Top Layer w5: U1.34 595.39,2417.02 619.56,2441.2 675.23,2496.87 1089.96,2496.87 1323.81,2263.02 T18.1 1376.38,2169.24 1376.38,1973.34 1389.7,1960.02 J3.3 1546.13,1960.02 1609.06,2022.94 J2.5
LCD_RST: J2.6 J3.2 T19.1 U1.35 | length 1908.3
  Top Layer w5: U1.35 545.39,2443.02 625.42,2523.06 1107.49,2523.06 T19.1 1410.68,2002.9 1426,1987.58 J3.2 1510.28,1987.58 1531.59,2008.89 1531.59,2355.08 1509.06,2377.62 J2.6
LED_ALARM: D2.2 U1.5 | length 182.5
  Top Layer w5: U1.5 503.36,1641.52 503.36,1480.56 D2.2
LED_DEBUG: D1.2 U1.4 | length 179.4
  Top Layer w5: U1.4 445.39,1481.07 D1.2
NetD1_1: D1.1 R1.2 | length 91.4
  Top Layer w5: R1.2 D1.1
NetD2_1: D2.1 R2.2 | length 91.4
  Top Layer w5: R2.2 D2.1
NetJ1_1: J1.1
NetJ1_2: J1.2
NetJ1_3: J1.3
NetJ1_4: J1.4
NetJ1_A5: J1.A5 R6.2 | length 100.1
  Top Layer w5: J1.A5@294.49,346.96 294.99,347.46 340.75,347.46 349.25,355.96 370.81,355.96 R6.2
NetJ1_A8: J1.A8
NetJ1_B5: J1.B5 R5.2 | length 277.4
  Top Layer w5: J1.B5@294.49,228.85 421,228.85 428.81,221.04 500.55,221.04 521.36,241.85 R5.2
NetJ1_B8: J1.B8
NetR8_1: R8.1 U1.26 | length 67
  Top Layer w5: U1.26 R8.1
NetR9_2: R9.2 U1.16 | length 188.9
  Top Layer w5: U1.16 1047.01,1768.98 1063.71,1752.29 1063.71,1706.37 1041.4,1684.06 R9.2
NetU1_10: U1.10
NetU1_11: U1.11
NetU1_15: U1.15
NetU1_25: U1.25
NetU1_28: U1.28
NetU1_29: U1.29
NetU1_30: U1.30
NetU1_38: U1.38
NetU1_39: U1.39
NetU2_9: U2.9
NetU2_10: U2.10
NetU2_11: U2.11
NetU2_12: U2.12
NetU2_15: U2.15
NetU2_17: U2.17
NetU2_25: U2.25
NetU2_27: U2.27
NetU2_33: U2.33
NetU2_34: U2.34
NetU2_36: U2.36
NetU2_42: U2.42
NetU3_9: U3.9
NetU3_12: U3.12
NetY1_1: Y1.1
PAM_MUTE: U1.12 U3.5 | length 1771.7
  Top Layer w5: U1.12 846.53,1648.35 v1@846.53,1586 ; v1(1617.09,336.1) U3.5
  Bottom Layer w5: v1(846.53,1590) 846.53,1413.44 916.72,1343.25 916.72,898.01 1478.63,336.1 v1(1617.09,336.1)
PAM_VREF: C7.2 U3.8 | length 54
  Top Layer w5: C7.2 1466.45,388.95 U3.8
RCAP: C19.2 U2.44 | length 170.9
  Top Layer w8: U2.44 1648.34,727.44 1658.93,716.86 1658.93,680.61 1672.64,666.9 C19.2
RXD0: J4.3 U1.36 | length 1178.3
  Top Layer w5: v1(409.45,1732.35) 445.39,1768.28 445.39,2193.27 496.06,2243.95 496.06,2337.8 U1.36
  Bottom Layer w5: J4.3 209.43,1332.28 409.45,1532.3 v1(409.45,1732.35)
TXD0: J4.2 U1.37 | length 1255.3
  Top Layer w5: v1(409.45,1779.53) 409.45,2210.33 445.39,2246.27 U1.37
  Bottom Layer w5: J4.2 260.83,1336.81 444.88,1520.87 444.88,1744.09 v1(409.45,1779.53)
USB_DM: D3.1 J1.A7 J1.B7 U1.14 | length 2012.2
  Top Layer w5: J1.B7@294.49,327.28 253.02,327.28 249.24,331.06 230.76,331.06 217.69,317.99 217.69,298.35 230.76,285.28 249.24,285.28 251.87,287.91 294.49,287.91 D3.1 541.76,287.91 644,390.15 644,532.27 687.58,575.85 771.9,575.85 822.93,626.88 822.93,1291.81 945.39,1414.26 U1.14
USB_DP: D4.1 J1.A6 J1.B6 U1.13 | length 1923.5
  Top Layer w5: v1(240,254.54) 241.3,254.54 251.58,264.81 291.08,264.81 J1.B6@294.49,268.22 ; v1(240,307.59) 294.49,307.59 333.97,307.59 350.1,323.72 D4.1 507.94,323.72 613,428.77 613,550.29 665.28,602.57 749.71,602.57 790.45,643.31 790.45,1312.84 895.39,1417.78 U1.13
  Bottom Layer w5: v1(240,254.54) v1(240,307.59)
VCC_1V8: C2.2 C11.2 C12.2 C13.2 C14.2 C20.2 IC2.3 T28.1 U2.5 U2.7 U2.24 U2.31 | length 2040.6
  Top Layer w8: IC2.3 C2.2 1097.64,906.64 T28.1 C20.2 ; C20.2@1236.23,956.18 C20.2 ; C20.2@1240.57,951.73 C20.2@1245.02,947.28 ; v1@1383.46,970.1 v1@1384.5,970.1 ; U2.31 1415.91,975.87 1410.15,970.1 v1(1385.55,970.1) v1@1384.5,970.1 ; C14.2 1478.83,1244.17 v1(1478.83,1151.06) U2.24 ; U2.5 1831.98,956.18 v1(1848.1,940.06) 1850.76,937.41 1877.91,937.41 1895.06,920.26 1904.09,920.26 C12.2 ; U2.7 1823.26,995.55 1840.76,1013.06 v1(1840.76,1042.8) 1893.98,1042.8 C13.2 ; C20.2 C20.2@1245.02,947.28 ; C20.2@1245.02,947.28 C11.2 1361.68,947.28 v1@1384.5,970.1
  Bottom Layer w8: v1(1385.55,970.1) 1451.04,970.1 ; v1(1478.83,1151.06) 1451.04,1123.26 1451.04,970.1 ; v1@1839.76,1042.8 1839.76,991.8 1818.06,970.1 ; v1(1848.1,940.06) 1818.06,970.1 ; 1451.04,970.1 1818.06,970.1
VCC_3V3: C1.2 C8.2 C9.2 C10.2 C15.2 C16.2 C17.2 C18.2 C21.2 C22.2 C23.2 C24.2 C26.2 IC1.3 J3.9 J4.6 R1.1 R2.1 R3.2 R4.1 R7.1 R10.1 R11.2 T26.1 U1.2 U2.6 U2.14 U2.19 U2.38 U2.43 U2.45 Y1.4 | length 7871.6
  Top Layer w5: J4.6 106.3,1182.28 106.3,1389.76 141.73,1425.2 R10.1 ; v1(344.67,1279.55) 397.54,1279.55 R1.1 R2.1 ; v1(1365.67,1235.89) 1400.44,1235.89 R4.1 ; R7.1 1396.83,719.52 C10.2@1409.24,707.11
  Top Layer w8: C10.2 1414.12,702.98 1504.92,702.98 C16.2 1523.24,710.06 1523.24,762.48 1530.23,769.47 U2.38 ; C21.2 1565.53,1253.48 1565.53,1245.6 1591,1220.12 v1(1591,1220) 1591.25,1220 1608.97,1202.28 U2.19 ; C17.2 v1(1604.28,734.6) ; v1(1604.28,734.6) 1622.32,752.64 1622.32,790.88 1628.65,797.22 U2.43 ; U2.45 1668.02,751.24 1698.53,720.73 v1@1756.71,720.73 ; U2.14 1707.39,1192.83 1725.17,1210.6 1758.76,1210.6 1780.14,1231.98 1780.14,1248.48 C24.2 ; C18.2 v1(1757.09,720.73)
  Top Layer w10: Y1.4 1713.73,1266.24 1787.77,1266.24 C24.2 ; U2.6 v1(1870.98,975.87) C23.2
  Top Layer w12: v1(1314.64,1633.46) C26.2 1314.64,1766.55 1339.94,1791.85 1375.39,1791.85 R11.2 1393.96,1794.67 J3.9 ; C24.2 C22.2 1866.77,1254.24 1939.87,1254.24 C15.2 v1(1941.83,1210.13)
  Top Layer w16: v1(344.67,1371.88) 344.67,1436.23 C8.2 344.67,1447.65 344.67,1526.34 C9.2 345.39,1541.05 U1.2 ; IC1.3 C1.2 v1(1149.45,287.87) 1175.31,313.74 1175.31,557.17 T26.1 v1(1321.12,702.98) 1407.55,702.98 C10.2
  Bottom Layer w8: 1314.64,1235.89 v1(1365.67,1235.89) 1575.11,1235.89 v1(1591,1220)
  Bottom Layer w10: 1314.64,1235.89 v1(1314.64,1633.46)
  Bottom Layer w16: J4.6 56.3,1046.12 284.98,817.44 468.85,817.44 ; v1(344.67,1371.88) v1(344.67,1279.55) 344.67,1156.38 468.85,1032.2 468.85,817.44 ; v1(1149.45,287.87) 1053.98,287.87 983.97,357.88 581.63,357.88 468.85,470.66 468.85,817.44 ; 1314.64,1235.89 1314.64,946.54 1352.74,908.43 1352.74,734.6 ; v1(1321.12,702.98) 1352.74,734.6 ; v1(1941.83,1210.13) 1904.41,1172.7 1904.41,1009.29 v1(1870.98,975.87) 1897.23,949.62 1897.23,860.87 v1(1757.09,720.73) 1658.77,720.73 1645.01,734.49 1604.39,734.49 v1(1604.28,734.6) 1352.74,734.6
VCC_VBUS: C3.1 C4.2 C5.2 C6.2 C25.2 D5.1 IC1.1 IC2.1 J2.8 M1.2 T27.1 U3.4 U3.6 U3.13 | length 5268.3
  Top Layer w16: M1.2 D5.1 T27.1 696.04,87.96 840.23,87.96 859.04,106.77 ; IC2.1 904.09,385.08 859.04,340.04 859.04,106.77 ; J2.8 1384.84,2501.97 2028.06,2501.97 2108.8,2421.23 2108.8,762.81 1848.86,502.87 1676.47,502.87 1667.09,493.49 C5.2 ; U3.6 1567.09,458.35 C5.2 ; C6.2@1662.86,103.66 1298.34,103.66 C3.1 1234.77,106.77 C25.2 IC1.1 859.04,106.77 ; C6.2 U3.13 U3.4 C5.2
VCC_VBUS_IN: J1.A4B9 J1.B4A9 M1.1 | length 519.8
  Top Layer w8: J1.A4B9@294.49,392.24 286.68,384.43 192.31,384.43 187.63,379.74 187.63,215.76 192.31,211.07 286.68,211.07 294.49,203.26 349.89,203.26 350.59,202.56 350.86,202.56 364.81,188.61 364.81,188.34 381.38,171.77 M1.1
VS1053_CS: T2.1 U1.20 U2.23 | length 1168.4
  Top Layer w5: U1.20 1047.01,1968.98 1158.22,1857.78 1158.22,1575.84 1254.42,1479.64 1421.64,1479.64 T2.1 1515.57,1385.71 1515.57,1202.93 1525.6,1192.89 1525.6,1184.59 1529.57,1180.61 1529.57,1151.72 U2.23
VS1053_DCS: T7.1 U1.21 U2.13 | length 1987.2
  Top Layer w5: U1.21 1048.01,2018.98 1182.45,1884.55 1182.45,1593.48 1269.24,1506.69 1488.97,1506.69 T7.1 1979.6,1476.55 2015.64,1440.52 2015.64,1205.15 1980.43,1169.94 1729.32,1169.94 1727.08,1167.7 U2.13
VS1053_DREQ: T3.1 U1.22 U2.8 | length 2200.2
  Top Layer w5: U1.22 1049.01,2068.98 1207.12,1910.88 1207.12,1606.55 1277.04,1536.63 1532.36,1536.63 1547.34,1521.66 T3.1 1972.61,1521.66 2047.15,1447.12 2047.15,1199.89 1975.27,1128.02 1765.16,1128.02 1749.11,1111.97 1749.11,1018.17 1752.04,1015.24 U2.8
VS1053_MCLK: U2.18 Y1.3 | length 129.5
  Top Layer w5: Y1.3 1638.23,1255.12 1638.23,1195.92 1628.97,1186.66 1628.97,1151.38 U2.18
VS1053_MISO: T4.1 U1.17 U2.30 | length 1112.6
  Top Layer w5: U1.17 1047.01,1818.98 1086.7,1779.29 1086.7,1511.39 1209,1389.09 1209,1123.25 1336.7,995.55 U2.30
VS1053_MOSI: T5.1 U1.18 U2.29 | length 1117.3
  Top Layer w5: U1.18 1047.01,1868.98 1110.24,1805.76 1110.24,1536.76 1260,1387 T5.1 1260,1135.62 1380.38,1015.24 U2.29
VS1053_RST: T1.1 U1.23 U2.3 | length 2430.5
  Top Layer w5: U1.23 1049.01,2118.98 1230.75,1937.24 1230.75,1623.01 1286.11,1567.65 T1.1 1981.02,1567.65 2073.41,1475.26 2073.41,919.4 2004.68,850.67 1890.19,850.67 1824.05,916.81 U2.3
VS1053_SCK: T6.1 U1.19 U2.28 | length 1126.7
  Top Layer w5: U1.19 1047.01,1918.98 1133.79,1832.21 1133.79,1566.44 1308,1392.23 1308,1143.04 1390.46,1060.58 1398.14,1060.58 1422.88,1035.85 1452.53,1035.85 U2.28
VS_LEFT: U2.46 U3.7 | length 1168.4
  Top Layer w5: U3.7 1517.09,344.09 1489,316 1421.05,316 1374,363.05 1374,473.49 1415.08,514.57 1564.61,514.57 1581.42,531.37 1766.25,531.37 1822.27,587.4 1822.27,726.92 1795.53,753.66 1703.11,753.66 1687.71,769.07 U2.46
VS_RIGHT: U2.39 U3.10 | length 919
  Top Layer w5: U3.10 1517.09,238.91 1471.52,284.48 1416.47,284.48 1349.52,351.42 1349.52,491.79 1395.66,537.92 1537.92,537.92 1556.71,556.71 1556.71,760.19 1549.91,766.99 U2.39
VS_RX: R4.2 U2.26 | length 144.1
  Top Layer w5: R4.2@1401.92,1160.39 1401.92,1089.63 1417.26,1074.29 U2.26 ; R4.2@1401.92,1161.39 R4.2
VS_TEST: R7.2 U2.32 | length 177.6
  Top Layer w5: R7.2 1387.84,839.44 1387.84,906.37 1398.97,917.5 1398.97,937.41 1417.75,956.18 U2.32
pads on no net: J1.X

## Polygon pours and split planes (outlines as drawn)
GND on Layer 1 "GND_L02_P000" (solid, remove dead copper, pour order 0): 0,2559.05 2165.35,2559.05 2165.36,0 0,0
GND on Layer 2 "GND_L03_P001" (solid, remove dead copper, pour order 1): 0,2559.05 2165.35,2559.05 2165.36,0 0,0
GND on Top Layer "GND_L01_P002" (solid, remove dead copper, pour order 2): 0,2559.05 2165.35,2559.05 2165.36,0 0,0
GND on Bottom Layer "GND_L04_P003" (solid, remove dead copper, pour order 3): 0,2559.05 2165.35,2559.05 2165.36,0 0,0

## Keep-outs
Keep-Out Layer:
  rectangle: 0,1536.8 236.72,2559.06
  lines w10: 0,3.15 2165.35,3.15 2165.35,2559.06 0,2559.05 0,3.15

## Silkscreen, mask and mechanical layers (free items; w line width, h text height)
Board:
  lines w4: 197.74,1536.8 0,1536.8 0,0 2165.35,0 2165.35,2559.06 236.72,2559.06 236.72,1575.78 ; 197.83,1536.89 ccw(c197.83,1575.79) 236.73,1575.79

## Text inside footprints (layer, text, board x,y; h text height)
U1: Top Assembly "ANTENNA" at 128.46,1816.82 h50 r90